# EAGLE board NanoDemultiplexerAndSDcardNew3 (EAGLE 9.6.2)
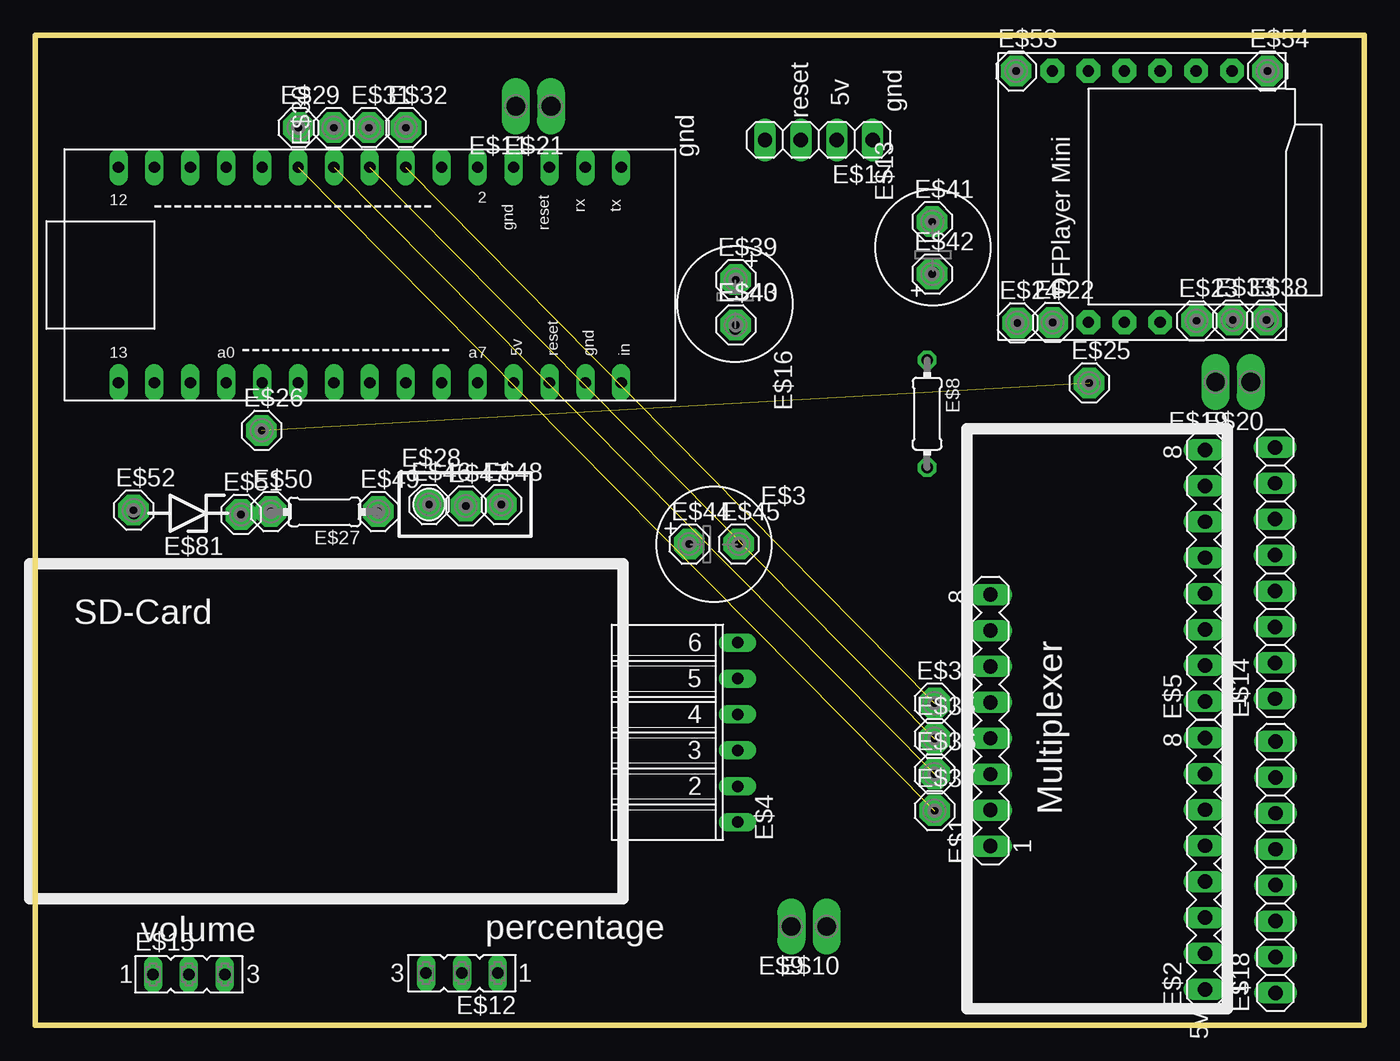
[diagram p0: board, top side]
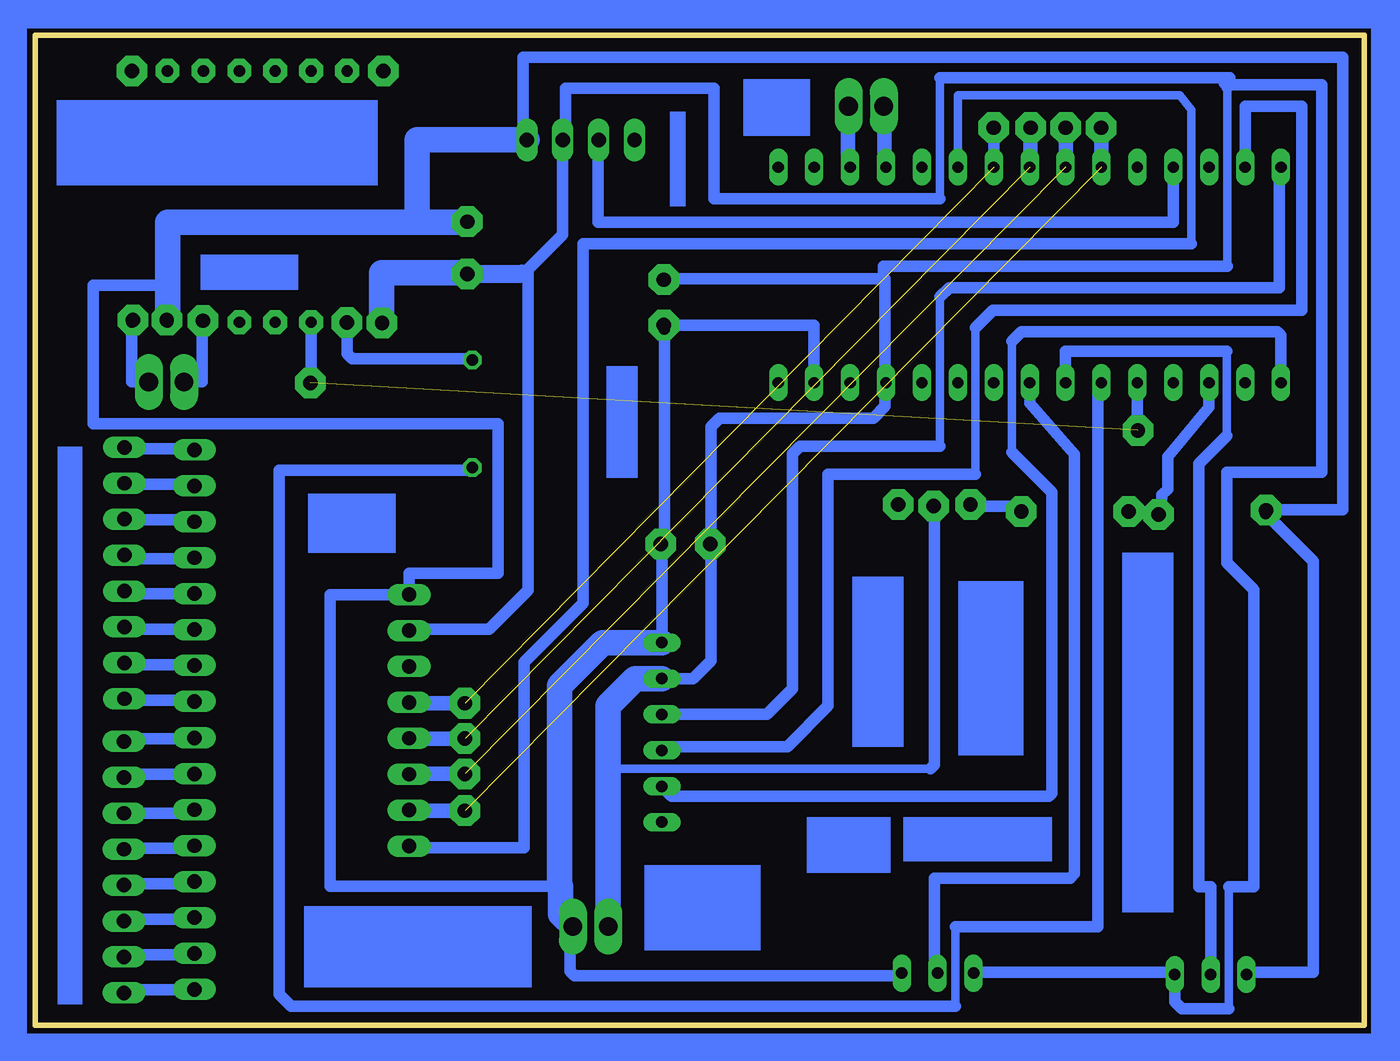
[diagram p1: board, bottom side, seen from below]

Size 94 x 70 mm. Coordinates in mm from the lower left corner, seen from the top.
Outline: 0,0 0,70 94,70 94,0 0,0
Copper layers (1*16): Top 0.035mm / dielectric 1.5mm / Bottom 0.035mm
Design rules "for_pcb_garage_middle *": minimum track width 0.6mm, minimum drill 0.35mm, track to track 0.2mm, track to pad 0.2mm, pad to pad 0.2mm, via to via 6mil, smd to smd 6mil, copper to edge 40mil, drill to drill 6mil, minimum pad ring 10mil, minimum via ring 8mil, stop-mask expansion 4mil, vias tented up to drill 0mil, thermal gap 10mil
Net classes: 0 default: clearance 0.205 mm

## Footprints (pad centres in the part's own frame; a part is rotated, then mirrored left to right if it is on the bottom)
MA08-1 = drill 1.016 long: 1 -8.89,0; 2 -6.35,0; 3 -3.81,0; 4 -1.27,0; 5 1.27,0; 6 3.81,0; 7 6.35,0; 8 8.89,0
E3,5-8 = drill 0.813 pad 1.6: + -1.778,0 | drill 0.813 pad 1.6 octagon: - 1.778,0
FE06W = drill 0.813 long: 1 -6.35,0; 2 -3.81,0; 3 -1.27,0; 4 1.27,0; 5 3.81,0; 6 6.35,0
DFPLAYER = drill 0.8 pad 1.676 octagon: ADKEY1 8.89,-1.27; ADKEY2 8.89,1.27; BUSY 8.89,8.89; DAC_L -8.89,-1.27; DAC_R -8.89,1.27; GND_1 -8.89,-6.35; GND_2 8.89,-6.35; IO1 8.89,-8.89; IO2 8.89,-3.81; RX -8.89,6.35; SPK1 -8.89,-3.81; SPK2 -8.89,-8.89; TX -8.89,3.81; USB+ 8.89,3.81; USB- 8.89,6.35; VCC -8.89,8.89
ARDUINO-NANO = drill 0.8 long: P$2 -17.78,7.62; P$4 -15.24,7.62; P$5 -12.7,7.62; P$8 -10.16,7.62; P$9 -7.62,7.62; P$12 -5.08,7.62; P$13 -2.54,7.62; P$16 0,7.62; P$17 2.54,7.62; P$20 5.08,7.62; P$21 7.62,7.62; P$24 10.16,7.62; P$25 12.7,7.62; P$28 15.24,7.62; P$29 17.78,7.62; P$31 -17.78,-7.62; P$34 -15.24,-7.62; P$35 -12.7,-7.62; P$38 -10.16,-7.62; P$39 -7.62,-7.62; P$42 -5.08,-7.62; P$43 -2.54,-7.62; P$46 0,-7.62; P$47 2.54,-7.62; P$50 5.08,-7.62; P$51 7.62,-7.62; P$54 10.16,-7.62; P$55 12.7,-7.62; P$58 15.24,-7.62; P$59 17.78,-7.62
0204/7 = drill 0.813 octagon: 1 -3.81,0; 2 3.81,0
P1-13Y = drill 1.321 pad 1.905 long: TP 0,0
FE03-1 = drill 0.813 long: 1 -5.08,0; 2 -2.54,0; 5 0,0
1X08 = drill 1.016 long: 1 -8.89,0; 2 -6.35,0; 3 -3.81,0; 4 -1.27,0; 5 1.27,0; 6 3.81,0; 7 6.35,0; 8 8.89,0
1X04 = drill 1.016 long: 1 -3.81,0; 2 -1.27,0; 3 1.27,0; 4 3.81,0
MCS10B = drill 1.016 pad 2.159 octagon: MP 0,0
RTRIM3296W = drill 0.61: 1 0,-2.54; 2 0,0; 3 0,2.54
ZDIO-7.5 = drill 0.813 octagon: A 3.81,0; C -3.81,0

## Placement (x,y rotation side)
E$1  [MA08-1]  67.56,21.56 90 top
E$2  [MA08-1]  82.76,11.43 90 top
E$3  [E3,5-8]  48,34 0 top
E$4  [FE06W]  49.67,20.71 90 top
E$5  [MA08-1]  82.76,31.79 90 top
E$6  [DFPLAYER]  78.3,58.6 90 top
E$7  [ARDUINO-NANO]  23.66,53.06 0 top
E$8  2.2K  [0204/7]  63.09,43.24 270 top
E$9  [P1-13Y]  53.48,6.99 180 top
E$10  [P1-13Y]  55.98,6.99 180 top
E$11  [P1-13Y]  33.98,64.99 180 top
E$12  [FE03-1]  27.63,3.68 180 top
E$13  [E3,5-8]  63.5,55 90 top
E$14  [1X08]  87.71,31.98 90 top
E$15  [FE03-1]  13.4,3.6 0 top
E$16  [E3,5-8]  49.5,51 270 top
E$17  [1X04]  55.42,62.61 180 top
E$18  [1X08]  87.73,11.18 90 top
E$19  [P1-13Y]  83.48,45.49 180 top
E$20  [P1-13Y]  85.98,45.49 180 top
E$21  [P1-13Y]  36.48,64.99 180 top
E$22  [MCS10B]  71.96,49.7 0 top
E$23  [MCS10B]  82.15,49.82 0 top
E$24  [MCS10B]  69.47,49.67 0 top
E$25  [MCS10B]  74.55,45.42 0 top
E$26  [MCS10B]  16.01,42.07 0 top
E$27  50  [0204/7]  20.44,36.3 180 top
E$28  501  [RTRIM3296W]  30.4,36.82 270 top
E$29  [MCS10B]  18.61,63.47 0 top
E$30  [MCS10B]  21.11,63.47 90 top
E$31  [MCS10B]  23.61,63.47 0 top
E$32  [MCS10B]  26.21,63.47 0 top
E$33  [MCS10B]  84.71,49.87 0 top
E$34  [MCS10B]  63.61,22.77 0 top
E$35  [MCS10B]  63.61,20.27 0 top
E$36  [MCS10B]  63.61,17.77 0 top
E$37  [MCS10B]  63.61,15.17 0 top
E$38  [MCS10B]  87.11,49.87 0 top
E$39  [MCS10B]  49.55,52.72 0 top
E$40  [MCS10B]  49.55,49.52 0 top
E$41  [MCS10B]  63.45,56.82 0 top
E$42  [MCS10B]  63.45,53.12 0 top
E$43  [MCS10B]  49.55,49.52 0 top
E$44  [MCS10B]  46.25,34.02 0 top
E$45  [MCS10B]  49.75,34.02 0 top
E$46  [MCS10B]  27.85,36.82 0 top
E$47  [MCS10B]  30.45,36.72 0 top
E$48  [MCS10B]  32.95,36.82 0 top
E$49  [MCS10B]  24.25,36.32 0 top
E$50  [MCS10B]  16.65,36.32 0 top
E$51  [MCS10B]  14.55,36.12 0 top
E$52  [MCS10B]  6.95,36.42 0 top
E$53  [MCS10B]  69.37,67.47 0 top
E$54  [MCS10B]  87.17,67.47 0 top
E$81  zener 4.3v  [ZDIO-7.5]  10.8,36.2 180 top

## Library data of the parts
E$1 E$2 E$5 = con-lstb
E$3 E$13 E$16 E$28 = rcl
E$4 = con-lsta
E$6 = DFPlayer_v1
E$7 = LSGPackages
E$8 E$27 = resistor
E$9-E$11 E$19-E$21 = testpad
E$12 E$15 = con-lsta2
E$14 E$17 E$18 = pinhead
E$22-E$26 E$29-E$54 = solpad
E$81 = ref-packages-longpad

## Nets
5V: E$1.7 E$3.+ E$4.5 E$6.VCC E$7.P$54 E$9.TP E$12.5 E$13.+ E$15.5 E$16.+ E$17.2 E$28.2
GND: E$1.8 E$3.- E$4.6 E$6.GND_1 E$7.P$58 E$10.TP E$12.1 E$13.- E$15.1 E$16.- E$17.1 E$81.A
MISO: E$4.4 E$7.P$2
MOSI: E$4.3 E$7.P$4
RESET: E$7.P$8 E$17.3
RX: E$6.RX E$8.1
S0: E$1.5 E$7.P$17 E$32.MP E$34.MP
S1: E$1.4 E$7.P$16 E$31.MP E$35.MP
S2: E$1.3 E$7.P$13 E$30.MP E$36.MP
S3: E$1.2 E$7.P$12 E$29.MP E$37.MP
S$2: E$7.P$35 E$27.2 E$81.C
S$3: E$27.1 E$28.1
S$4: E$7.P$46 E$12.2
S$9: E$7.P$9
S$10: E$7.P$42 E$8.2
S$15: E$5.8 E$14.8
S$16: E$5.7 E$14.7
S$17: E$5.6 E$14.6
S$18: E$5.5 E$14.5
S$19: E$5.4 E$14.4
S$20: E$5.3 E$14.3
S$21: E$5.2 E$14.2
S$22: E$5.1 E$14.1
S$23: E$2.8 E$18.8
S$24: E$2.7 E$18.7
S$25: E$2.6 E$18.6
S$26: E$2.5 E$18.5
S$31: E$2.4 E$18.4
S$32: E$2.3 E$18.3
S$33: E$2.2 E$18.2
S$34: E$2.1 E$18.1
SCK: E$4.2 E$7.P$31
SIGN: E$1.1 E$7.P$20
SPK1: E$6.SPK1 E$19.TP
SPK2: E$6.SPK2 E$20.TP
SPK3: E$7.P$24 E$11.TP
SPK4: E$7.P$25 E$21.TP
TX: E$6.TX E$7.P$39 E$25.MP E$26.MP
VOLUME-CONTROL: E$7.P$43 E$15.2

## Tracks (layer width: path | path; a pad name or v marks a point on that pad's centre or on a via)
5V
  Bottom 0.61: 53.48,18.15 30.68,18.15 | 9.58,9.8 9.58,1.15 | 9.69,53.68 9.69,66.31 | 30,67 30,58.45
  Bottom 0.813: E$3.+ 46.22,25.78 47.48,24.52 E$4.5 | E$6.VCC 69.5,49.8 | E$16.+ 34,52.78 | 34,52.78 33.91,52.78 33.91,45.52 E$7.P$54 33.9,45.41 33.9,43.76 34.73,42.92 45.61,42.92 46.22,42.31 E$3.+ | 34,52.78 34,53.68 9.69,53.68 | 59.6,53.15 59.31,53.29 56.69,55.91 E$17.2 56.5,62.75 56.5,66.25 46,66.25 46,58.45 30,58.45 | E$1.7 67.47,28 61.92,28 59.15,30.77 59.15,53.15 | 30.68,18.15 30.4,18.43 E$28.2 | E$12.5 27.5,3.75 13.5,3.75 E$15.5 13.4,1.65 12.9,1.15 9.58,1.15 | 9.58,9.8 7.8,9.8 7.8,30.8 9.7,32.7 9.7,39.09 3,39.09 3,66.5 9.5,66.5 | 9.69,66.31 9.5,66.5 | 9.5,66.5 9.4,66.6 9.9,66.6 9.5,67 30,67 | 45.75,34.25 | 45.75,34.25 E$3.+ | 63.43,53.15 E$13.+
  Bottom 1.27: 63.43,53.15 59.6,53.15
  Bottom 1.8: E$9.TP 53.48,18.15 53.48,22.6 51.56,24.52 E$4.5 | 69.5,49.8 69.5,53.22 E$13.+
GND
  Bottom 0.813: E$4.6 49.67,33.89 E$3.- 49.5,34.5 E$16.- | E$16.- 49.32,49.4 49.22,49.5 38.9,49.5 E$7.P$58 | E$15.1 8.25,3.75 3.6,3.75 3.6,32.81 E$81.A 7,36.44 1.5,36.44 1.5,68.44 59.5,68.44 59.5,62.88 E$17.1 | E$12.1 32.89,3.5 55.85,3.5 56.18,3.83 56.18,6.79 E$10.TP | 56.84,9.83 56.93,9.83 73.15,9.83 73.15,30.45 69.35,30.45 E$1.8 67.56,31.95 67.54,31.95 61.25,31.95 61.25,42.53 89.89,42.53 89.89,52.33 84.65,52.33 | 49.6,49.12 E$16.-
  Bottom 1.8: 56.93,9.83 56.93,24.02 53.89,27.06 E$4.6 | 56.84,9.83 56.84,7.85 E$10.TP | E$6.GND_1 84.65,52.33 84.65,56.78 67,56.78 | 67,56.78 E$13.- | E$17.1 67,62.61 67,56.78
MISO
  Bottom 0.61: 30,40.95 30,51.5
  Bottom 0.813: 30,51.5 29.35,52.15 6,52.15 6,60.5 E$7.P$2 | 30,40.95 39.91,40.95 40.46,40.41 40.46,23.79 42.25,22 49.5,22 E$4.4
MOSI
  Bottom 0.61: 27.49,38.95 27.49,49.31
  Bottom 0.813: E$7.P$4 8.42,65 4.4,65 4.4,50.55 26.25,50.55 27.49,49.31 | 27.49,38.95 37.92,38.95 37.92,22.58 40.8,19.7 49.3,19.7 49.5,19.5 E$4.3
RESET
  Bottom 0.813: E$7.P$8 13.5,56.8 54.2,56.8 54.2,62.56 E$17.3
RX
  Bottom 0.813: E$8.1 63.09,47.12 71.6,47.12 71.95,47.49 E$6.RX
S0  (1 unrouted)
  Bottom 0.6: 67.5,22.77 E$1.5 | E$7.P$17
  Bottom 0.813: E$32.MP E$7.P$17
  Bottom 1.016: E$34.MP 67.5,22.77
S1  (1 unrouted)
  Bottom 0.6: 67.54,20.27 E$1.4 | 23.61,60.73 E$7.P$16
  Bottom 1.016: E$35.MP 67.54,20.27 | E$31.MP 23.61,60.73
S2  (1 unrouted)
  Bottom 0.6: 67.54,17.77 E$1.3 | 21.11,60.69 E$7.P$13
  Bottom 1.016: E$36.MP 67.54,17.77 | E$30.MP 21.11,60.69
S3  (1 unrouted)
  Bottom 0.6: 67.52,15.17 E$1.2 | 18.61,60.7 E$7.P$12
  Bottom 1.016: E$37.MP 67.52,15.17 | E$29.MP 18.61,60.7
S$2
  Bottom 0.813: E$7.P$35 11,45.25 11,43.7 13.9,40.2 13.9,37.9 14.3,37.5 14.4,36.25 E$81.C 14.66,36.3 E$27.2
S$3
  Bottom 0.813: E$27.1 24.66,36.7 27.7,36.7 27.75,36.75 E$28.1
S$4
  Bottom 0.813: E$12.2 30.4,3.91 30.4,10.4 20.8,10.4 20.5,10.7 20.5,40.38 23.66,43.97 E$7.P$46
S$10
  Bottom 0.61: 28.9,1.35 28.9,6.95
  Bottom 0.813: 28.9,6.95 18.85,6.95 18.85,45.14 E$7.P$42 | 28.9,1.35 75.9,1.35 76.75,2.2 76.75,39.25 63.1,39.25 E$8.2
S$15
  Bottom 0.813: E$5.8 83,40.75 87.5,40.75 E$14.8
S$16
  Bottom 0.813: E$5.7 83,38.25 87.5,38.25 E$14.7
S$17
  Bottom 0.813: E$5.6 83,35.75 87.5,35.75 E$14.6
S$18
  Bottom 0.813: E$5.5 83,33 87.5,33 E$14.5
S$19
  Bottom 0.813: E$5.4 83,30.5 87.5,30.5 E$14.4
S$20
  Bottom 0.813: E$5.3 83,28 87.5,28 E$14.3
S$21
  Bottom 0.813: E$5.2 83,25.5 87.5,25.5 E$14.2
S$22
  Bottom 0.813: E$5.1 83,23 87.5,23 E$14.1
S$23
  Bottom 0.813: E$2.8 83,20.25 87.5,20.25 E$18.8
S$24
  Bottom 0.813: E$2.7 83,17.75 87.5,17.75 E$18.7
S$25
  Bottom 0.813: E$2.6 83,15 87.5,15 E$18.6
S$26
  Bottom 0.813: E$2.5 83,12.5 87.5,12.5 E$18.5
S$31
  Bottom 0.813: E$2.4 83,10 87.5,10 E$18.4
S$32
  Bottom 0.813: E$2.3 83,7.5 87.5,7.5 E$18.3
S$33
  Bottom 0.813: E$2.2 83,5 87.5,5 E$18.2
S$34
  Bottom 0.813: E$2.1 83,2.5 87.5,2.5 E$18.1
SCK
  Bottom 0.61: 24.93,40.53 24.93,48.37
  Bottom 0.813: E$7.P$31 5.88,48.78 6.15,49.05 24.25,49.05 24.93,48.37 | 24.93,40.53 22.1,37.7 22.1,16.4 22.29,16.21 48.98,16.21 E$4.2
SIGN
  Bottom 0.61: E$7.P$20 28.74,65.75 13.05,65.75 12.23,64.73 12.23,55.25
  Bottom 0.813: 12.23,55.25 55.25,55.25 55.25,29.84 59.42,25.68 59.42,12.55 67.44,12.55 E$1.1
SPK1
  Bottom 0.813: E$6.SPK1 82.19,49.59 82.19,45.5 83.25,45.5 E$19.TP
SPK2
  Bottom 0.813: E$6.SPK2 87.18,49.7 87.18,45.5 86,45.5 E$20.TP
SPK3
  Bottom 0.813: E$7.P$24 33.95,60.8 | 33.95,64.96 E$11.TP
  Bottom 1.016: 33.95,64.96 33.95,60.8
SPK4
  Bottom 0.813: 36.5,60.75 E$7.P$25 | 36.5,64.75 E$21.TP
  Bottom 1.016: 36.5,64.75 36.5,60.75
TX  (1 unrouted)
  Bottom 0.813: E$6.TX 74.49,45.48 E$25.MP | E$7.P$39 16.04,42.11 E$26.MP
VOLUME-CONTROL
  Bottom 0.61: 9.7,47.65 9.7,41.7
  Bottom 0.813: E$7.P$43 21.12,47.65 9.7,47.65 | 9.7,41.7 11.68,39.72 11.68,9.8 10.86,9.8 E$15.2
(copper drawn outside any net)
  shapes: Bottom area x18

## Text on the board
tPlace: reset | gnd | 5v | gnd | SD-Card | Multiplexer | percentage | volume | 5v
bTest: gnd | vcc | vcc | gnd | vcc | gnd | Demultiplexer | SD card | Tx | Vcc battery | Gnd battery